# Altium PCB PCB1.PcbDoc
Units mm, origin at the board's own origin, x right, y up, seen from the top; angles counter-clockwise.
Board outline 51.69 x 72.77 mm, 2 copper layers (Top Layer, Bottom Layer), stack 2.391 mm thick; 23 components, 13 nets, 54 pads, 4 vias.
Unrouted connection lines stored in the file: 10.
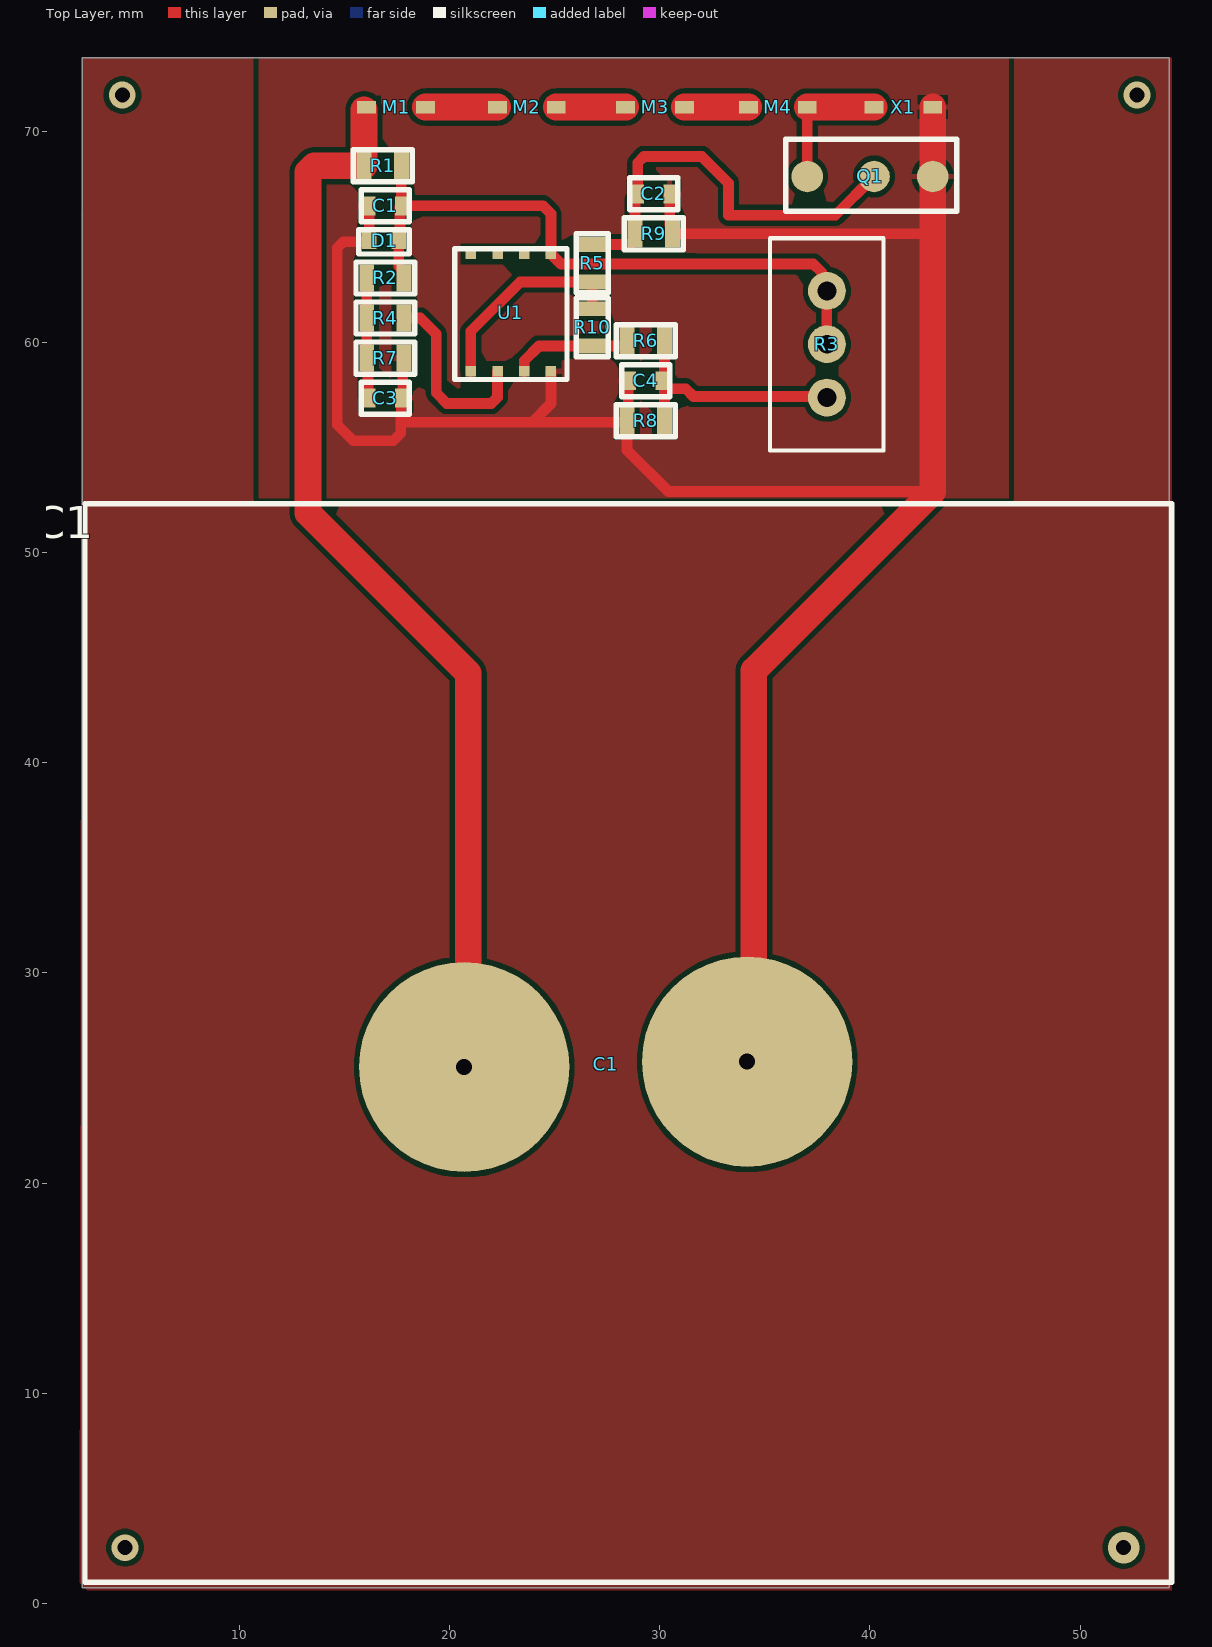
[diagram p0: Top Layer view]
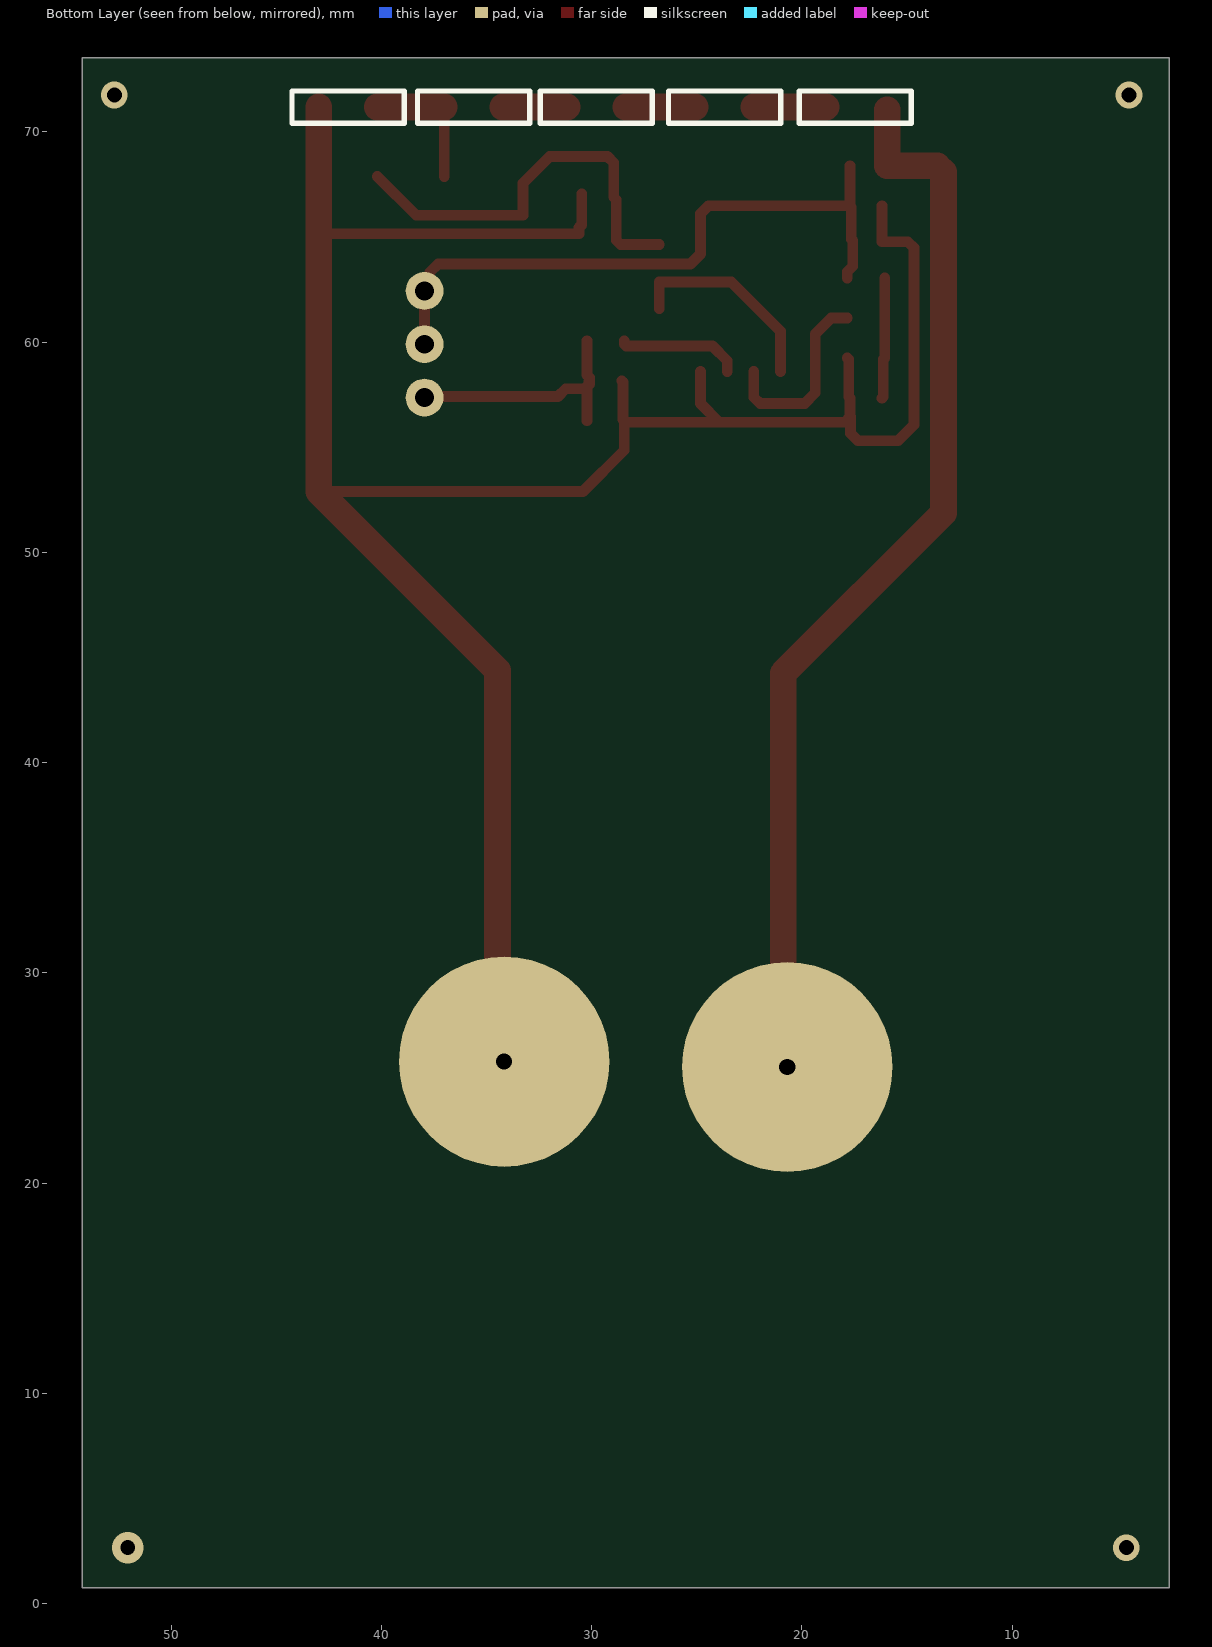
[diagram p1: Bottom Layer view, seen from below]
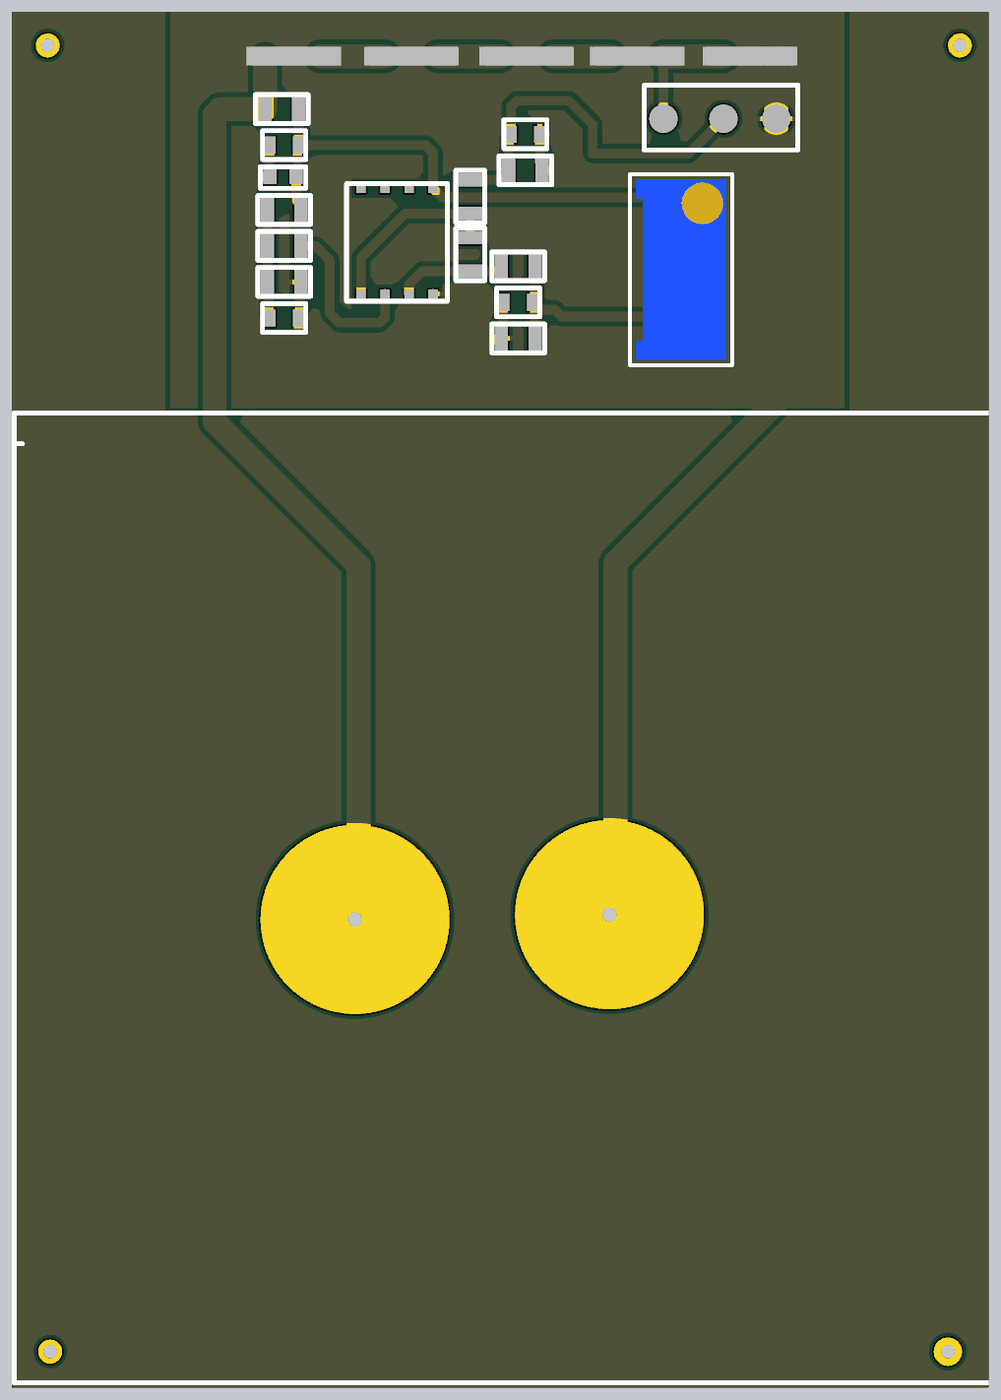
[diagram p2: 3D render of the assembled board from above, using the file's embedded part models]

## Layer stack, top to bottom
Top Solder: solder mask 0.0102, Solder Resist, Dk 3.5
Top Layer: signal copper 0.0356
Dielectric 1: dielectric 2.32, FR-4, Dk 4.8
Bottom Layer: signal copper 0.0356
Bottom Solder: solder mask 0.0102, Solder Resist, Dk 3.5

## Board outline
2.54,0.762 54.229,0.762 54.229,73.533 2.54,73.533

## Design rules (kind name [scope] priority, off if disabled: settings)
Clearance [All] p1: gap=0.254 ignorepadtopadclearanceinfootprint=FALSE
PolygonConnect [All] p1: connectstyle=Relief reliefconductorwidth=0.254 reliefentries=4 polygonreliefangle="90 Angle" airgapwidth=0.254
RoutingVias [All] p1: holewidth=0.711 width=1.27 viastyle="Through Hole" minholewidth=0.711 minwidth=1.27 maxholewidth=0.711 maxwidth=1.27
SolderMaskExpansion [All] p1: expansion=0.102 istentingtop=FALSE
SupplyNets "Schematic Supply Nets" [InNet('GND')] p1: voltage=0.000
Width [All] p1: maxlimit=2.54 minlimit=0.508 preferedwidth=0.508
30 further rules are at their usual default settings.

## Components (designator, comment, footprint, x,y, rotation, side; value= is the part's Value field where it differs from the comment)
C1 "1 мкF" PCBComponent_1 16.954,66.484 r0 top
C2 "1 мкF" PCBComponent_1 29.718,67.056 r180 top
C3 "1 мкF" PCBComponent_1 16.954,57.34 r0 top
C4 "1 мкF" PCBComponent_1 29.337,58.166 r180 top
D1 "diod_stabilitron" "PCBComponent_1 - duplicate1" 16.828,64.834 r180 top
M1 "FUN" "PCBComponent_1 - duplicate3" 17.462,71.183 r180 top
M2 "FUN" "PCBComponent_1 - duplicate3" 23.685,71.183 r180 top
M3 "FUN" "PCBComponent_1 - duplicate3" 29.781,71.183 r180 top
M4 "FUN" "PCBComponent_1 - duplicate3" 35.623,71.183 r180 top
Q1 "BD139" transistor 40.195,67.882 r270 top
R1 "10 кОм" "Resistor SMD 0805" 16.828,68.389 r180 top
R2 "10 кОм" "Resistor SMD 0805" 16.954,63.055 r180 top
R3 "1кОм" adj 37.91,59.88 r270 top
R4 "10 кОм" "Resistor SMD 0805" 16.954,61.151 r180 top
R5 "10 кОм" "Resistor SMD 0805" 26.797,63.754 r270 top
R6 "10 кОм" "Resistor SMD 0805" 29.337,60.071 r0 top
R7 "1кОм" "Resistor SMD 0805" 16.954,59.245 r180 top
R8 "10 кОм" "Resistor SMD 0805" 29.337,56.261 r180 top
R9 "10 кОм" "Resistor SMD 0805" 29.718,65.151 r0 top
R10 "10 кОм" "Resistor SMD 0805" 26.797,60.706 r270 top
U1 "5218L" "PCBComponent_1 - duplicate4" 22.924,61.404 r90 top
X1 "Header 2" "PCBComponent_1 - duplicate3" 41.593,71.183 r180 top
С1 "220000F" "PCBComponent_1 - duplicate2" 27.305,25.527 r0 top

## Footprints (in the part's own frame and the unit in brackets; to place one, negate y for a bottom-side part, rotate by r counter-clockwise, add the part's x,y. Pads: shape width x height; smd on the part's side, far side on the other; paste and mask are expansions set on the pad)
adj [mm]
  round 1.8 hole 0.9: 1(-2.562,0.043) 2(-0.022,0.043) 3(2.518,0.043)
  silkscreen extent -5.06,-2.66 5.04,2.74, body extent -4.79,-2.36 4.74,2.44, height 11.55
PCBComponent_1 [mm]
  rect 0.6x0.9 smd: 1(-0.762,0) 2(0.762,0)
  silkscreen extent -1.14,-0.76 1.14,0.76, body extent -0.98,-0.51 1.02,0.69, height 0.61
"PCBComponent_1 - duplicate1" [mm]
  rect 0.7x0.8 smd: 1(-0.762,0) 2(0.635,0)
  silkscreen extent -1.27,-0.51 1.14,0.64, body extent -1,-0.42 1,0.43
"PCBComponent_1 - duplicate2" [mil]
  round 393.7 hole 30: 1(-260,0) 2(270,10)
  silkscreen extent -970,-965 1065,1055, body extent -958,-962 1050,1042
"PCBComponent_1 - duplicate3" [mm]
  rect 0.9x0.6 smd: 1(-1.397,0) 2(1.397,0)
  body extent -2.5,-0.51 2.5,0.49
"PCBComponent_1 - duplicate4" [mm]
  rect 0.5x0.5 smd: 1(-2.794,1.905) 2(-2.794,0.635) 3(-2.794,-0.635) 4(-2.794,-1.905) 5(2.794,1.905) 6(2.794,0.635) 7(2.794,-0.635) 8(2.794,-1.905)
  silkscreen extent -3.17,-2.67 3.05,2.67, body extent -2.88,-2.6 2.92,2.6
"Resistor SMD 0805" [mm]
  rect 0.7x1.3 smd: 1(0.889,0) 2(-0.889,0)
  silkscreen extent -1.4,-0.76 1.4,0.76, body extent -1,-0.6 1,0.6, height 0.61
transistor [mm]
  round 1.5 smd: 1(0,-3.175) 2(0,0) 3(0,2.794)
  silkscreen extent -1.78,-4.19 1.65,3.94, body extent -1.38,-4.15 1.52,3.65

## Part data
C1 C2 C3 C4: library part condensator, "Condensator_SDM_0805"
D1: "diod", manufacture="Diodes Incorporated", partnamber=D24V0S1U2TQ-7, href=https://www.chipdip.ru/product0/8004701593
M1 M2 M3 M4: library part ventilator
Q1: library part transistor
R1 R2 R4 R5 R6 R8 R9 R10: library part resistor_SMD0805
R3: library part "resistor peremen"
R7: library part "resistor temerature"
U1: library part operasion_ysil
X1: library part rasiom
С1: library part condensator+, "220000UF 20% 100V", manufacture="Nichicon Corp.", partnamber=LNR2A224MSE, href=https://www.chipdip.ru/product0/8005615214?from=suggest_product

## Via types
v1: diameter 1.27, hole 0.711, Top Layer to Bottom Layer, 3 vias
v2: diameter 1.5, hole 0.711, Top Layer to Bottom Layer, 1 vias

## Nets (pads, with @x,y where several pads share a name; then routed paths per layer and width w, separated by ;. In a path a pad name is that pad's centre, name@x,y a point inside that pad or via, vN(x,y) a via of type N, cw(c..) or ccw(c..) an arc to the next point about the centre after c; other vN are vias at no path point)
GND: C1.1 C2.1 C3.2 C4.2 D1.2 Q1.3 R7.2 R8.1 R9.1 U1.4 X1.2 С1.2 | length 116.5
  Top Layer w0.508: C1.1 D1.2 16.192,64.784 14.966,64.784 14.668,64.486 14.668,56.07 15.43,55.308 17.335,55.308 17.692,55.665 17.692,56.451 ; R7.2 17.78,59.182 17.78,57.404 C3.2 17.716,56.451 17.97,56.197 23.939,56.197 ; U1.4 24.828,57.087 23.939,56.197 ; R8.1@28.511,56.325 28.511,58.102 C4.2 ; C2.1 30.48,65.578 30.607,65.451 R9.1 42.989,65.151 ; С1.2@32.766,25.273 С1.2@34.163,23.876 ; 42.989,52.895 30.416,52.895 28.448,54.864 R8.1 28.384,56.197 23.939,56.197
  Top Layer w1.27: С1.2@34.29,25.781 34.48,25.971 34.48,44.386 42.989,52.895 42.989,65.151 Q1.3 42.989,71.183
NetC1_2: C1.2 D1.1 R1.2 R2.2 R3.1 R3.2 U1.8 | length 31.4
  Top Layer w0.508: R1.2 C1.2 ; R2.2 17.843,63.355 17.59,63.609 D1.1 17.653,64.897 17.653,66.421 C1.2 ; R3.2 R3.1 37.705,62.69 37.705,63.322 37.304,63.724 25.303,63.724 U1.8 24.828,66.103 24.447,66.484 C1.2
NetC2_2: C2.2 Q1.2 R5.2 R9.2 | length 20
  Top Layer w0.508: R5.2 28.621,64.643 28.829,64.851 R9.2 28.829,66.779 28.956,66.906 C2.2 28.956,68.536 29.254,68.834 32.004,68.834 33.274,67.564 33.274,66.04 38.354,66.04 Q1.2
NetC3_1: C3.1 R2.1 R4.1 R7.1 | length 5.8
  Top Layer w0.508: R2.1 R4.1 R7.1 16.129,59.182 16.129,57.404 C3.1
NetC4_1: C4.1 R3.3 R6.1 R8.2 | length 12
  Top Layer w0.508: C4.1@30.099,58.316 30.226,58.443 R6.1 ; R8.2 30.226,57.889 30.145,57.97 30.145,58.12 C4.1 30.099,58.016 30.33,57.785 31.242,57.785 31.608,57.419 37.896,57.419 R3.3
NetM1_2: M1.2 M2.1 | length 3.4
  Top Layer w1.27: 18.86,71.183 22.288,71.183
NetM2_2: M2.2 M3.1 | length 3.3
  Top Layer w1.27: 25.082,71.183 28.384,71.183
NetM3_2: M3.2 M4.1 | length 3
  Top Layer w1.27: 31.178,71.183 34.227,71.183
NetM4_2: M4.2 Q1.1 X1.1 | length 6.5
  Top Layer w0.508: Q1.1 37.02,71.183
  Top Layer w1.27: 37.02,71.183 40.195,71.183
NetR4_2: R4.2 U1.2 | length 9.1
  Top Layer w0.508: R4.2 18.605,61.151 19.367,60.389 19.367,57.595 19.876,57.087 21.991,57.087 22.288,57.384 U1.2
NetR5_1: R5.1 R10.2 U1.1 | length 9.9
  Top Layer w0.508: U1.1 21.018,60.515 23.368,62.865 R5.1 R10.2
NetR6_2: R6.2 R10.1 U1.3 | length 5.9
  Top Layer w0.508: U1.3 23.558,59.118 24.257,59.817 R10.1 28.352,59.817 28.448,59.913 R6.2
OffSheet: M1.1 R1.1 С1.1 | length 53.5
  Top Layer w0.508: 15.938,71.056 16.066,71.183
  Top Layer w1.27: 15.938,71.056 R1.1 13.569,68.389 13.271,68.092 13.271,51.88 20.892,44.259 С1.1@20.892,23.368
pads on no net: U1.5 U1.6 U1.7
copper on no net:
  other v1: 4.572,2.667 4.445,71.755 52.705,71.755
  other v2: 52.07,2.667

## Polygon pours and split planes (outlines as drawn)
no net on Top Layer "NONET_L01_P001" (solid, pour order 1): 2.54,73.533 54.356,73.533 54.356,0.635 2.413,0.635
GND on Top Layer "GND_L01_P000" (solid, pour order 0): 10.922,73.533 46.609,73.533 46.609,52.578 10.922,52.578